# EAGLE board flight-computer v12 (EAGLE 9.7.0)
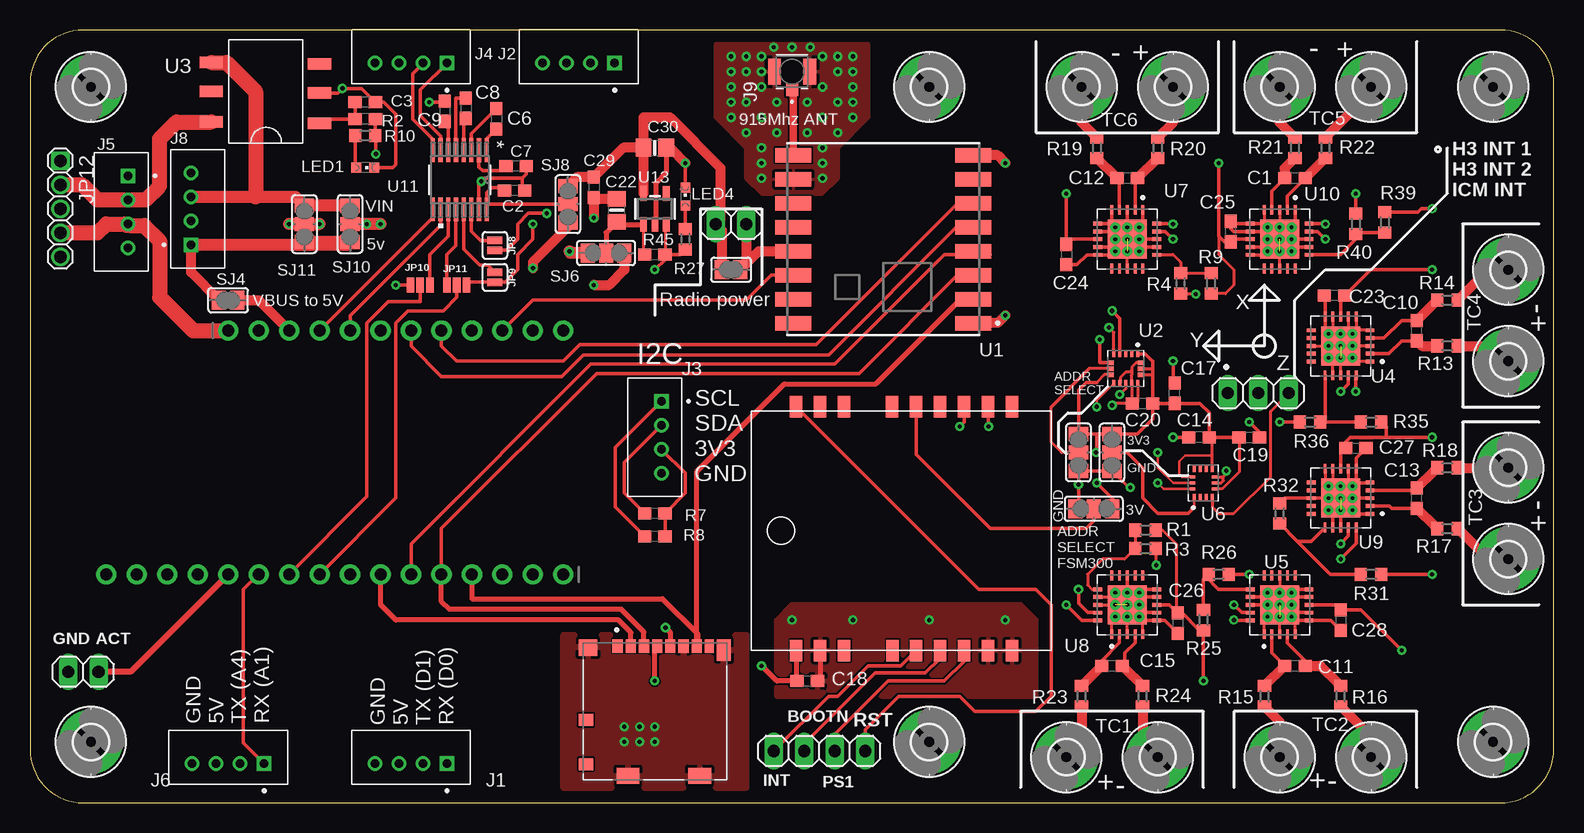
[diagram p0: board, top side]
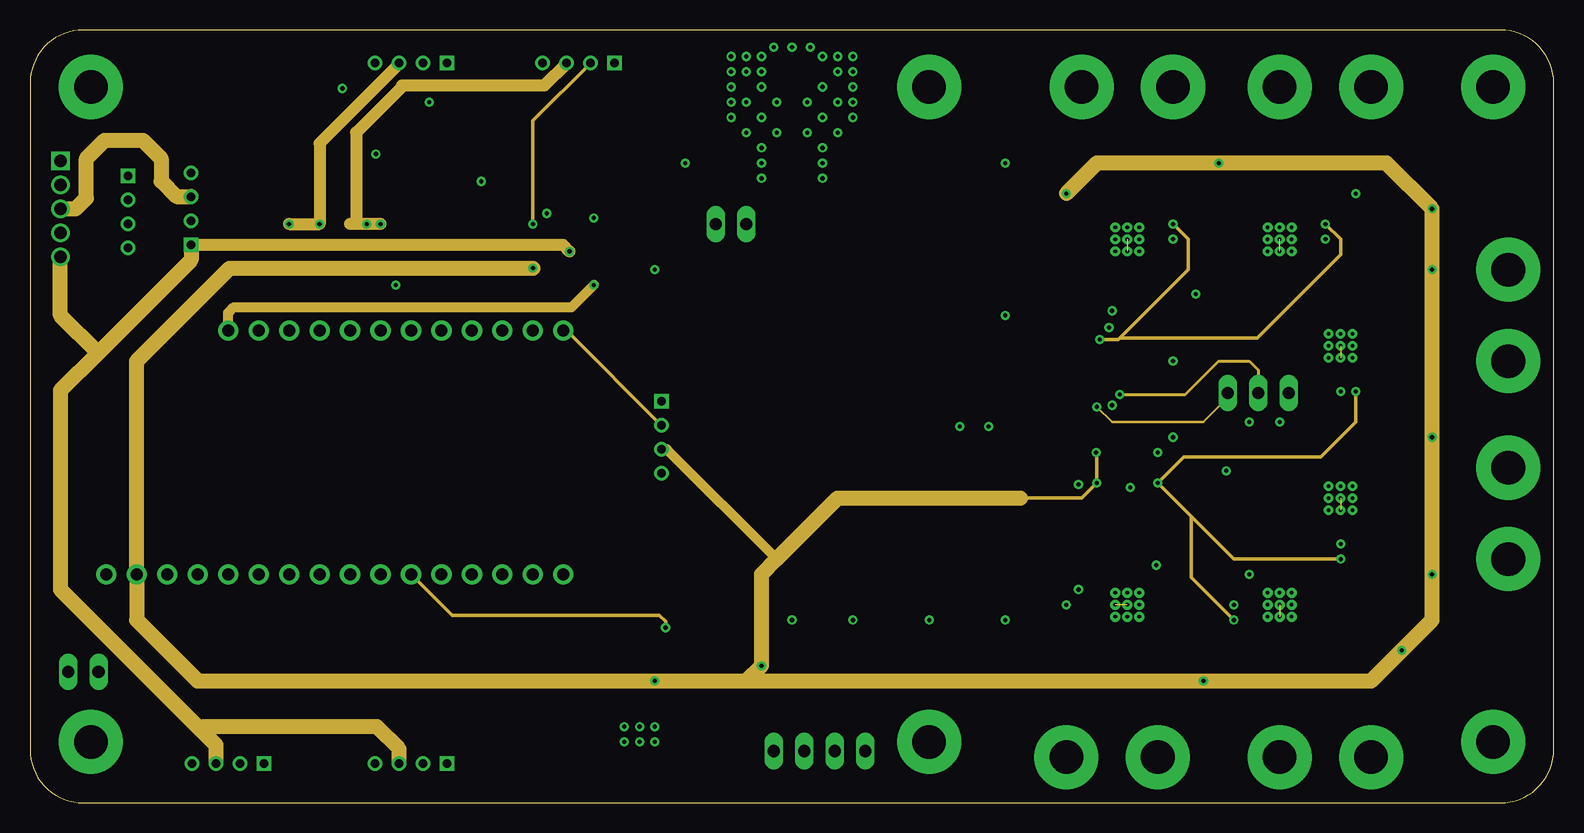
[diagram p1: board, inner layer Route2]
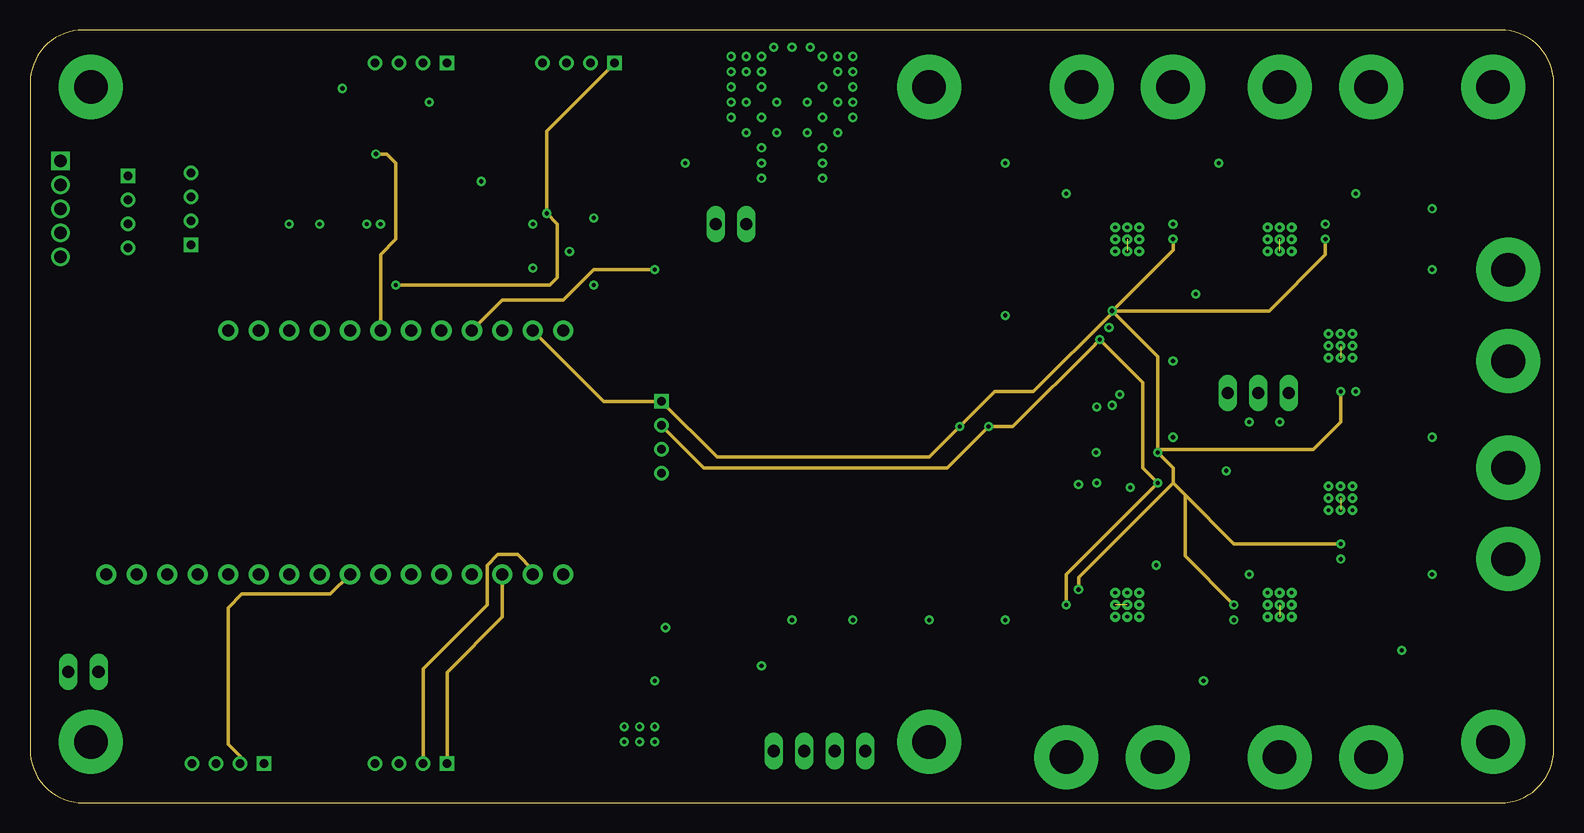
[diagram p2: board, inner layer Route15]
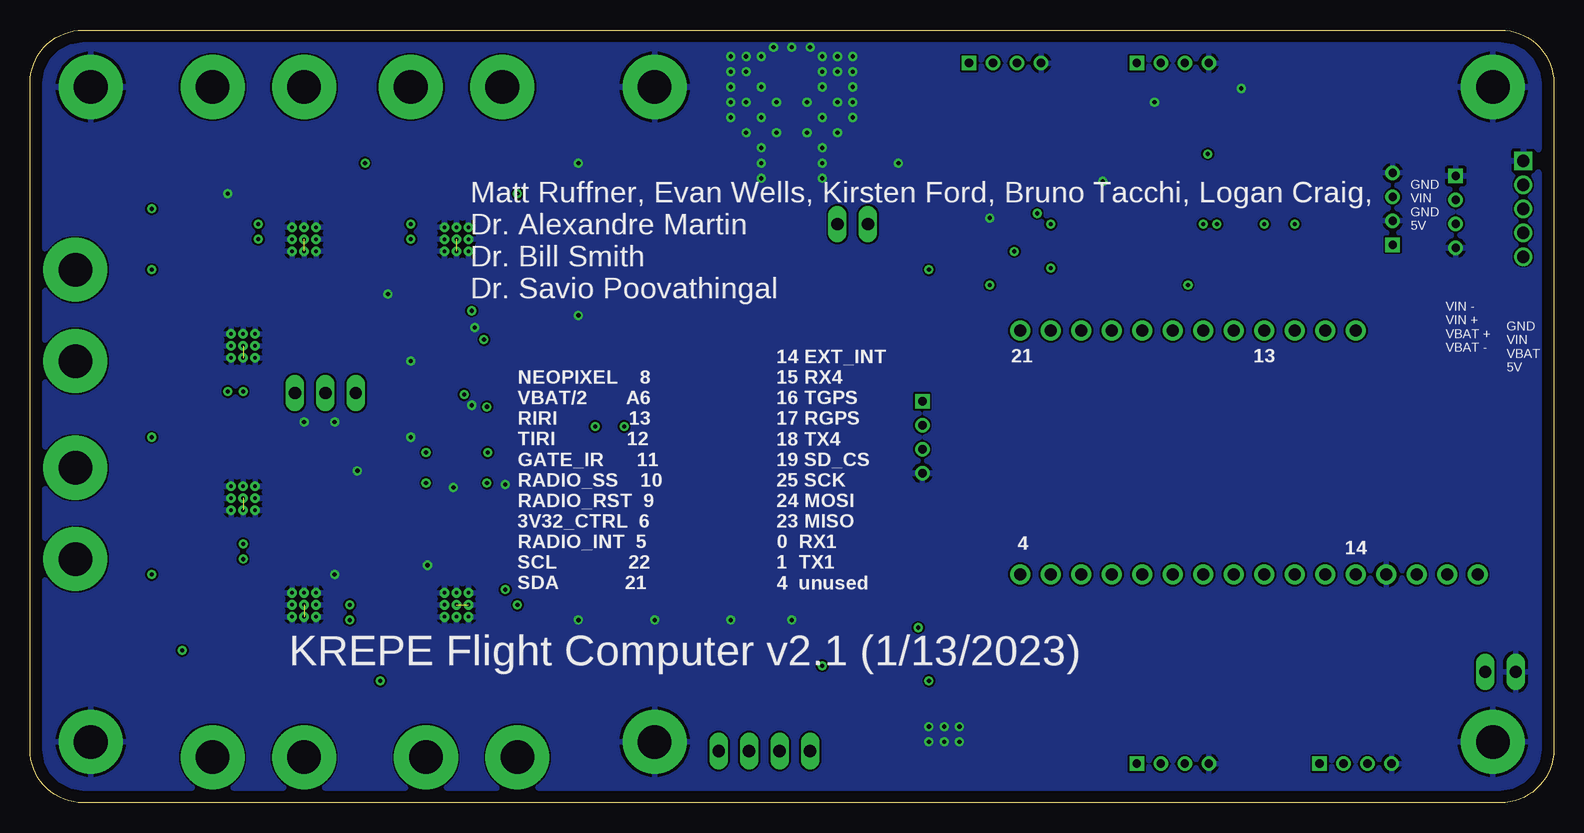
[diagram p3: board, bottom side, seen from below]

Size 126.98 x 64.44 mm. Coordinates in mm from the lower left corner, seen from the top.
Outline: 0,59.99 0,4.45 arc90 4.45,0 122.53,0 arc90 126.98,4.45 126.98,59.99 arc90 122.53,64.44 4.45,64.44 arc90 0,59.99
Copper layers (1*2+15*16): Top / Route2 / Route15 / Bottom
Stack-up Default Layer Stack: Top User Defined 0.035mm / Dielectric-2 User Defined 1.5mm / Route2 User Defined 0.035mm / Dielectric-1 User Defined 0.15mm / Route15 User Defined 0.035mm / Dielectric-3 User Defined 0.2mm / Bottom User Defined 0.035mm
Design rules: minimum drill size 0.35mm, minimum copper width class=1 12mil, minimum copper width class=2 10mil, minimum copper width 6mil, keepout clearance 0mil, drill distance 6mil, dimension clearance 40mil, restrict clearance 0mil, copper clearance wire_polygon to wire_polygon 6mil, copper clearance wire_polygon to pad_smd 6mil, copper clearance wire_polygon to via 6mil, copper clearance pad_smd to pad_smd 6mil, copper clearance pad_smd to via 6mil, copper clearance via to via 6mil, copper clearance smd to pad (same net) 6mil, copper clearance smd to via (same net) 6mil, copper clearance smd to smd (same net) 6mil
Net classes: 1 power: width 0.305 mm; 2 gnd: width 0.254 mm

## Footprints (pad centres in the part's own frame; a part is rotated, then mirrored left to right if it is on the bottom)
C0603 = smd 1.1 x 1: 1 -0.85,0; 2 0.85,0
0805-NO = smd 1.3 x 1.5: 1 -0.95,0; 2 0.95,0
0603-NO = smd 1.1 x 1: 1 -0.85,0; 2 0.85,0
2,8-PAD = drill 2.8 pad 5.334: B2,8 0,0
JST_B4B-PH-K-S(LF)(SN) = drill 0.7 square: 1 3,-0.55 | drill 0.7: 2 1,-0.55; 3 -1,-0.55; 4 -3,-0.55
MOLEX_104031-0811 = smd 0.85 x 1.1: 1 3.105,-5.45; 2 2.005,-5.45; 3 0.905,-5.45; 4 -0.195,-5.45; 5 -1.295,-5.45; 6 -2.395,-5.45; 7 -3.495,-5.45 | smd 0.75 x 1.1: 8 -4.545,-5.45 | smd 1.2 x 1: 9 5.74,0.7; 10 5.74,4.4 | smd 1.55 x 1.35: G1 5.565,-5.325 | smd 1.17 x 1.8: G2 -5.755,-5.1 | smd 1.9 x 1.35: G3 -3.73,5.375; G4 2.24,5.375
HRS_U.FL-R-SMT(10) = smd 1.05 x 1: 1 -1.525,0 | smd 2.2 x 1.05: 2 0,1.475; 3 0,-1.475
1X16_ROUND = drill 1 pad 1.676: 1 -19.05,0; 2 -16.51,0; 3 -13.97,0; 4 -11.43,0; 5 -8.89,0; 6 -6.35,0; 7 -3.81,0; 8 -1.27,0; 9 1.27,0; 10 3.81,0; 11 6.35,0; 12 8.89,0; 13 11.43,0; 14 13.97,0; 15 16.51,0; 16 19.05,0
1X12_ROUND = drill 1 pad 1.676: 1 -13.97,0; 2 -11.43,0; 3 -8.89,0; 4 -6.35,0; 5 -3.81,0; 6 -1.27,0; 7 1.27,0; 8 3.81,0; 9 6.35,0; 10 8.89,0; 11 11.43,0; 12 13.97,0
1X02 = drill 1.016 long: 1 -1.27,0; 2 1.27,0
1X04 = drill 1.016 long: 1 -3.81,0; 2 -1.27,0; 3 1.27,0; 4 3.81,0
1X03 = drill 1.016 long: 1 -2.54,0; 2 0,0; 3 2.54,0
SMT-JUMPER_2_NC_PASTE_SILK = smd 0.635 x 1.27: 1 -0.406,0; 2 0.406,0
SMT-JUMPER_3_2-NC_PASTE_NO-SILK = smd 0.635 x 1.27: 1 -0.813,0; 2 0,0; 3 0.813,0
1_05X2MM = drill 1.016 pad 1.3 square: 1 -4,0 | drill 1.016 pad 1.3: 2 -2,0; 3 0,0; 4 2,0; 5 4,0
CHIPLED_0603 = smd 0.8 x 0.8: A 0,-0.75; C 0,0.75
R0603 = smd 1 x 1.1: 1 -0.85,0; 2 0.85,0
SJ_2 = smd 1.168 x 1.6: 1 -1.524,0; 2 0,0; 3 1.524,0
SJ = smd 1.168 x 1.6: 1 -0.762,0; 2 0.762,0
MOD_COM-13909 = smd 3 x 1.2: 1 -7.5,7; 2 -7.5,5; 3 -7.5,3; 4 -7.5,1; 5 -7.5,-1; 6 -7.5,-3; 7 -7.5,-5; 8 -7.5,-7; 9 7.5,-7; 10 7.5,-5; 11 7.5,-3; 12 7.5,-1; 13 7.5,1; 14 7.5,3; 15 7.5,5; 16 7.5,7
PQFN50P300X300X100-16N = smd 0.53 x 0.35: 1 -1.22,1; 2 -1.22,0.5; 3 -1.22,0; 4 -1.22,-0.5; 5 -1.22,-1; 9 1.22,-1; 10 1.22,-0.5; 11 1.22,0; 12 1.22,0.5; 13 1.22,1 | smd 0.35 x 0.53: 6 -0.5,-1.22; 7 0,-1.22; 8 0.5,-1.22; 14 0.5,1.22; 15 0,1.22; 16 -0.5,1.22
SOP6 = smd 1.93 x 0.965: 1 -4.318,6.985; 2 -4.318,4.445; 3 -4.318,2.032; 4 4.699,1.905; 5 4.699,4.318; 6 4.699,6.858
QFN65P500X500X100-21N_MCP96L00T-E/MX = smd 0.81 x 0.32: 1 -2.45,1.3; 2 -2.45,0.65; 3 -2.45,0; 4 -2.45,-0.65; 5 -2.45,-1.3; 11 2.45,-1.3; 12 2.45,-0.65; 13 2.45,0; 14 2.45,0.65; 15 2.45,1.3 | smd 0.32 x 0.81: 6 -1.3,-2.45; 7 -0.65,-2.45; 8 0,-2.45; 9 0.65,-2.45; 10 1.3,-2.45; 16 1.3,2.45; 17 0.65,2.45; 18 0,2.45; 19 -0.65,2.45; 20 -1.3,2.45 | smd 3.25 x 3.25: 21 0,0 | drill 0.3 pad 0.5: 22 -1,1; 23 0,1; 24 1,1; 25 -1,0; 26 0,0; 27 1,0; 28 -1,-1; 29 0,-1; 30 1,-1
IC_ICM-42670-P = smd 0.475 x 0.25: 1 -1.163,0.75; 2 -1.163,0.25; 3 -1.163,-0.25; 4 -1.163,-0.75; 8 1.163,-0.75; 9 1.163,-0.25; 10 1.163,0.25; 11 1.163,0.75 | smd 0.25 x 0.475: 5 -0.5,-0.912; 6 0,-0.912; 7 0.5,-0.912; 12 0.5,0.912; 13 0,0.912; 14 -0.5,0.912
RQ_16_ADI = smd 1.981 x 0.351: 1 -2.465,2.24; 2 -2.465,1.6; 3 -2.465,0.96; 4 -2.465,0.32; 5 -2.465,-0.32; 6 -2.465,-0.96; 7 -2.465,-1.6; 8 -2.465,-2.24; 9 2.465,-2.24; 10 2.465,-1.6; 11 2.465,-0.96; 12 2.465,-0.32; 13 2.465,0.32; 14 2.465,0.96; 15 2.465,1.6; 16 2.465,2.24
SOT23-5 = smd 0.55 x 1.2: 1 -0.95,-1.3; 2 0,-1.3; 3 0.95,-1.3; 4 0.95,1.3; 5 -0.95,1.3
FSM300_FOOTPRINT = smd 1.778 x 1.016: 1 0,21.25; 2 0,19.25; 3 0,17.25; 4 0,13.208; 5 0,11.25; 6 0,9.25; 7 0,7.25; 8 0,5.25; 9 0,3.25; 10 20.32,3.25; 11 20.32,5.25; 12 20.32,7.25; 13 20.32,9.25; 14 20.32,11.25; 15 20.32,13.25; 16 20.32,17.25; 17 20.32,19.25; 18 20.32,21.25

## Placement (x,y rotation side)
C1  0.1uF  [C0603]  105.41,52.07 180 top
C2  0.1uF  [C0603]  40.39,51.05 180 top
C3  0.1uF  [C0603]  27.94,58.42 180 top
C6  0.1uF  [C0603]  38.86,57.02 270 top
C7  0.1uF  [C0603]  40.51,53.09 180 top
C8  0.1uF  [C0603]  36.32,57.91 270 top
C9  0.1uF  [C0603]  34.54,57.66 270 top
C10  0.1uF  [C0603]  115.57,39.37 90 top
C11  0.1uF  [C0603]  105.41,11.43 0 top
C12  0.1uF  [C0603]  91.44,52.07 180 top
C13  0.1uF  [C0603]  115.57,25.4 90 top
C14  0.1uF  [C0603]  97.41,30.48 180 top
C15  0.1uF  [C0603]  90.17,11.43 0 top
C17  0.1uF  [C0603]  95.38,34.16 90 top
C18  0.1uF  [C0603]  64.77,10.16 0 top
C19  0.1uF  [C0603]  101.6,30.48 0 top
C20  0.1uF  [C0603]  92.71,33.27 180 top
C22  10µF  [0805-NO]  48.9,49.4 90 top
C23  0.1uF  [C0603]  108.71,42.29 180 top
C24  0.1uF  [C0603]  86.36,45.72 270 top
C25  0.1uF  [C0603]  100.08,47.62 90 top
C26  0.1uF  [C0603]  95.63,14.99 270 top
C27  0.1uF  [C0603]  110.49,29.59 0 top
C28  0.1uF  [C0603]  109.22,15.24 270 top
C29  1uF  [0603-NO]  46.99,51.31 270 top
C30  10µF  [0805-NO]  52.07,54.61 0 top
H1  MOUNT-PAD-ROUND2.8  [2,8-PAD]  74.93,5.08 0 top
H2  MOUNT-PAD-ROUND2.8  [2,8-PAD]  74.93,59.69 0 top
H3  MOUNT-PAD-ROUND2.8  [2,8-PAD]  121.92,59.69 0 top
H4  MOUNT-PAD-ROUND2.8  [2,8-PAD]  121.92,5.08 0 top
H5  MOUNT-PAD-ROUND2.8  [2,8-PAD]  5.08,59.69 0 top
H6  MOUNT-PAD-ROUND2.8  [2,8-PAD]  5.08,5.08 0 top
H7  MOUNT-PAD-ROUND2.8  [2,8-PAD]  123.19,20.32 0 top
H8  MOUNT-PAD-ROUND2.8  [2,8-PAD]  123.19,27.94 0 top
H9  MOUNT-PAD-ROUND2.8  [2,8-PAD]  123.19,36.83 0 top
H10  MOUNT-PAD-ROUND2.8  [2,8-PAD]  123.19,44.45 0 top
H11  MOUNT-PAD-ROUND2.8  [2,8-PAD]  95.25,59.69 0 top
H12  MOUNT-PAD-ROUND2.8  [2,8-PAD]  87.63,59.69 0 top
H13  MOUNT-PAD-ROUND2.8  [2,8-PAD]  111.76,59.69 0 top
H14  MOUNT-PAD-ROUND2.8  [2,8-PAD]  104.14,59.69 0 top
H15  MOUNT-PAD-ROUND2.8  [2,8-PAD]  86.36,3.81 0 top
H16  MOUNT-PAD-ROUND2.8  [2,8-PAD]  93.98,3.81 0 top
H17  MOUNT-PAD-ROUND2.8  [2,8-PAD]  104.14,3.81 0 top
H18  MOUNT-PAD-ROUND2.8  [2,8-PAD]  111.76,3.81 0 top
J1  B4B-PH-K-S(LF)(SN)  [JST_B4B-PH-K-S(LF)(SN)]  31.75,3.81 0 top
J2  B4B-PH-K-S(LF)(SN)  [JST_B4B-PH-K-S(LF)(SN)]  45.72,62.23 0 top
J3  B4B-PH-K-S(LF)(SN)  [JST_B4B-PH-K-S(LF)(SN)]  52.07,30.48 90 top
J4  B4B-PH-K-S(LF)(SN)  [JST_B4B-PH-K-S(LF)(SN)]  31.75,62.23 0 top
J5  B4B-PH-K-S(LF)(SN)  [JST_B4B-PH-K-S(LF)(SN)]  7.62,49.28 90 top
J6  B4B-PH-K-S(LF)(SN)  [JST_B4B-PH-K-S(LF)(SN)]  16.51,3.81 0 top
J7  104031-0811  [MOLEX_104031-0811]  52.07,7.62 180 top
J8  B4B-PH-K-S(LF)(SN)  [JST_B4B-PH-K-S(LF)(SN)]  13.97,49.53 270 top
J9  U.FL-R-SMT(10)  [HRS_U.FL-R-SMT(10)]  63.5,60.96 90 top
JP1  [1X16_ROUND]  25.4,19.05 180 top
JP3  [1X12_ROUND]  30.48,39.37 0 top
JP4  [1X02]  58.42,48.26 180 top
JP5  [1X02]  4.45,10.92 180 top
JP6  [1X04]  65.79,4.32 180 top
JP7  [1X03]  102.36,34.16 180 top
JP8  JUMPER-SMT_2_NC_PASTE_SILK  [SMT-JUMPER_2_NC_PASTE_SILK]  38.73,46.48 270 top
JP9  JUMPER-SMT_2_NC_PASTE_SILK  [SMT-JUMPER_2_NC_PASTE_SILK]  38.73,43.81 270 top
JP10  JUMPER-SMT_3_2-NC_PASTE_NO-SILK  [SMT-JUMPER_3_2-NC_PASTE_NO-SILK]  32.51,43.18 0 top
JP11  JUMPER-SMT_3_2-NC_PASTE_NO-SILK  [SMT-JUMPER_3_2-NC_PASTE_NO-SILK]  35.56,43.18 180 top
JP12  PINHD-1X55X2MM  [1_05X2MM]  2.54,49.53 270 top
LED1  [CHIPLED_0603]  27.94,52.96 270 top
LED4  [CHIPLED_0603]  54.61,50.55 0 top
R1  10k  [R0603]  92.96,22.73 180 top
R2  288  [0603-NO]  27.94,57.02 180 top
R3  7.5k  [R0603]  92.96,21.21 180 top
R4  4.3k  [R0603]  95.89,43.31 90 top
R7  100k  [0603-NO]  52.07,24.13 180 top
R8  100k  [0603-NO]  52.07,22.23 180 top
R9  10k  [R0603]  98.42,43.31 90 top
R10  [R0603]  27.94,55.63 180 top
R13  100  [R0603]  118.11,38.1 180 top
R14  100  [R0603]  118.11,41.91 180 top
R15  100  [R0603]  102.87,8.89 90 top
R16  100  [R0603]  109.22,8.89 90 top
R17  100  [R0603]  118.11,22.86 180 top
R18  100  [R0603]  118.11,27.94 180 top
R19  100  [R0603]  88.9,54.61 270 top
R20  100  [R0603]  93.98,54.61 270 top
R21  100  [R0603]  105.41,54.61 270 top
R22  100  [R0603]  107.95,54.61 270 top
R23  100  [R0603]  87.63,8.89 90 top
R24  100  [R0603]  92.71,8.89 90 top
R25  10k  [R0603]  97.79,15.24 90 top
R26  13k  [R0603]  99.06,19.05 180 top
R27  [R0603]  54.61,46.99 90 top
R31  10k  [R0603]  111.76,19.05 180 top
R32  7.5k  [R0603]  104.14,24.13 270 top
R35  10k  [R0603]  111.76,31.75 180 top
R36  4.3k  [R0603]  106.68,31.75 0 top
R39  10k  [R0603]  112.9,48.39 270 top
R40  2.2k  [R0603]  110.49,48.26 270 top
R45  100k  [0603-NO]  52.07,45.72 0 top
SJ3  [SJ_2]  88.65,24.51 180 top
SJ4  [SJ]  16.51,41.91 0 top
SJ5  [SJ_2]  90.17,29.21 90 top
SJ6  [SJ_2]  48.01,45.85 0 top
SJ7  [SJ_2]  87.38,29.21 90 top
SJ8  [SJ_2]  44.83,49.91 90 top
SJ9  [SJ]  58.42,44.45 180 top
SJ10  [SJ_2]  26.67,48.26 270 top
SJ11  [SJ_2]  22.86,48.26 270 top
U1  COM-13909  [MOD_COM-13909]  71.12,46.99 180 top
U2  H3LIS100DLTR  [PQFN50P300X300X100-16N]  91.31,36.2 270 top
U3  AQV252G  [SOP6]  19.81,63.63 180 top
U4  MCP96L00T-E/MX  [QFN65P500X500X100-21N_MCP96L00T-E/MX]  109.22,38.1 180 top
U5  MCP96L00T-E/MX  [QFN65P500X500X100-21N_MCP96L00T-E/MX]  104.14,16.51 90 top
U6  ICM-42670-P  [IC_ICM-42670-P]  97.79,26.67 90 top
U7  MCP96L00T-E/MX  [QFN65P500X500X100-21N_MCP96L00T-E/MX]  91.44,46.99 270 top
U8  MCP96L00T-E/MX  [QFN65P500X500X100-21N_MCP96L00T-E/MX]  91.44,16.51 90 top
U9  MCP96L00T-E/MX  [QFN65P500X500X100-21N_MCP96L00T-E/MX]  109.22,25.4 180 top
U10  MCP96L00T-E/MX  [QFN65P500X500X100-21N_MCP96L00T-E/MX]  104.14,46.99 270 top
U11  UM3232EEAE  [RQ_16_ADI]  35.81,51.94 270 top
U13  SPX3819-3.3  [SOT23-5]  52.07,49.53 0 top
U$4  FSM300  [FSM300_FOOTPRINT]  85.09,12.7 90 top

## Library data of the parts
C1-C3 C6-C15 C17-C20 C23-C28 = rcl; SPICEPREFIX: C
C22 C29 C30 JP1 JP3 R2 R7 R8 R45 U13 = microbuilder
H1-H18 = holes
J1-J6 J8 = B4B-PH-K-S_LF__SN_; DESCRIPTION: Connector Header Through Hole 4 position 0.079 (2.00mm); DIGI-KEY_PART_NUMBER: 455-1706-ND; MF: JST; MP: B4B-PH-K-S(LF)(SN); PACKAGE: None; PURCHASE-URL: https://pricing.snapeda.com/search/part/B4B-PH-K-S(LF)(SN)/?ref=eda
J7 = 104031-0811; DESCRIPTION: 10 (8 + 2) Position Card Connector Secure Digital - microSD™ Surface Mount, Right Angle Gold; DIGI-KEY_PART_NUMBER: WM6357TR-ND; MF: Molex; MP: 104031-0811; PACKAGE: None; PURCHASE-URL: https://pricing.snapeda.com/search/part/104031-0811/?ref=eda
J9 = U.FL-R-SMT_10_; DESCRIPTION: U.FL (UMCC) Connector Receptacle, Male Pin 50Ohm Surface Mount Solder; DIGI-KEY_PART_NUMBER: H9161TR-ND; MF: Hirose Electric Co Ltd; MP: U.FL-R-SMT(10); PACKAGE: None; PURCHASE-URL: https://pricing.snapeda.com/search/part/U.FL-R-SMT(10)/?ref=eda
JP4-JP7 = pinhead
JP8-JP11 = SparkFun-Jumpers
JP12 = Connector; CATEGORY: CONNECTOR; SUB-CATEGORY: PIN-HEADER
LED1 LED4 = adafruit
R1 R3 R4 R9 R10 R13-R27 R31 R32 R35 R36 R39 R40 = rcl; SPICEPREFIX: R
SJ3-SJ11 = jumper
U1 = COM-13909; DESCRIPTION: General ISM < 1GHz Transceiver Module 915MHz Surface Mount; DIGI-KEY_PART_NUMBER: 1568-1394-ND; DIGI-KEY_PURCHASE_URL: https://www.digikey.com/product-detail/en/sparkfun-electronics/COM-13909/1568-1394-ND/6023504?utm_source=snapeda&utm_medium=aggregator&utm_campaign=symbol; MF: SparkFun Electronics; MP: COM-13909; PACKAGE: Module SparkFun Electronics
U2 = H3LIS100DLTR; DESCRIPTION: Accelerometer X, Y, Z Axis ±100g 25Hz ~ 200Hz 16-TFLGA (3x3); DIGI-KEY_PART_NUMBER: 497-15697-2-ND; MF: STMicroelectronics; MP: H3LIS100DLTR; PACKAGE: TFLGA-16 STMicroelectronics; PURCHASE-URL: https://pricing.snapeda.com/search/part/H3LIS100DLTR/?ref=eda
U3 = AQV252G; DESCRIPTION: Solid State SPST-NO (1 Form A) 6-SMD (0.300, 7.62mm); DIGI-KEY_PART_NUMBER: 255-1791-5-ND; MF: Panasonic; MP: AQV252G; PACKAGE: None; PURCHASE-URL: https://pricing.snapeda.com/search/part/AQV252G/?ref=eda
U4 U5 U7-U10 = MCP96L00T-E_MX; DESCRIPTION: +/- 4.0C THERMOCOUPLE TO I2C CON; DIGI-KEY_PART_NUMBER: MCP96L00T-E/MXCT-ND; MF: Microchip Technology; MP: MCP96L00T-E/MX; PACKAGE: VQFN-20 Microchip; PURCHASE-URL: https://pricing.snapeda.com/search/part/MCP96L00T-E/MX/?ref=eda
U6 = ICM-42670-P; DESCRIPTION: Low-Power, Premium Performance 6-Axis MotionTrackingTM IMU with I3C, I2C and SPI interface in 2.5mm x 3mm Package; DIGI-KEY_PART_NUMBER: 1428-ICM-42670-PTR-ND; MF: TDK InvenSense; MP: ICM-42670-P; PACKAGE: None; PURCHASE-URL: https://pricing.snapeda.com/search/part/ICM-42670-P/?ref=eda
U11 = ADM310
U$4 = COM-13909

## Nets
3V3: C14.1 C17.1 C18.1 C19.1 C20.1 C23.1 C24.1 C25.1 C26.1 C27.1 C28.1 J3.3 J7.4 JP1.15 R1.1 R7.1 R8.1 R9.1 R25.1 R31.1 R35.1 R39.1 SJ3.1 SJ5.3 SJ7.3 SJ8.1 U2.1 U2.8 U2.14 U2.15 U4.8 U5.8 U6.5 U6.8 U6.12 U7.8 U8.8 U9.8 U10.8 U$4.1
3V32: C29.1 C30.1 JP4.2 SJ8.3 SJ9.2 U13.5
3V32_CTRL: JP3.9 R27.1 R45.2 U13.3
5V: J1.3 J6.3 J8.1 JP12.5 SJ4.1 SJ6.1 SJ10.3 SJ11.3
!RESET: JP1.16
AREF: JP1.14
BOOTN: JP6.3 U$4.6
EXT_INT: JP1.12 JP5.1
FSM300_RESET: JP6.1 U$4.18
GATE_IRIDIUM: JP3.6 R2.1 R10.1
GND [gnd]: C2.1 C3.1 C7.1 C9.1 C14.2 C17.2 C18.2 C19.2 C20.2 C22.2 C23.2 C24.2 C25.2 C26.2 C27.2 C28.2 C29.2 C30.2 H1.B2,8 H2.B2,8 H3.B2,8 H4.B2,8 H5.B2,8 H6.B2,8 J1.4 J2.4 J3.4 J4.4 J5.1 J5.4 J6.4 J7.6 J7.G1 J7.G2 J7.G3 J7.G4 J8.2 J8.4 J9.2 J9.3 JP1.13 JP5.2 JP12.1 LED1.C LED4.C R3.1 R4.1 R26.1 R32.1 R36.1 R40.1 SJ3.3 SJ5.1 SJ7.1 U1.1 U1.8 U1.10 U2.5 U2.10 U2.12 U2.13 U2.16 U3.2 U4.1 U4.3 U4.5 U4.6 U4.7 U4.9 U4.10 U4.13 U4.17 U4.18 U4.21 U4.22 U4.23 U4.24 U4.25 U4.26 U4.27 U4.28 U4.29 U4.30 U5.1 U5.3 U5.5 U5.6 U5.7 U5.9 U5.10 U5.13 U5.17 U5.18 U5.21 U5.22 U5.23 U5.24 U5.25 U5.26 U5.27 U5.28 U5.29 U5.30 U6.6 U6.7 U7.1 U7.3 U7.5 U7.6 U7.7 U7.9 U7.10 U7.13 U7.17 U7.18 U7.21 U7.22 U7.23 U7.24 U7.25 U7.26 U7.27 U7.28 U7.29 U7.30 U8.1 U8.3 U8.5 U8.6 U8.7 U8.9 U8.10 U8.13 U8.17 U8.18 U8.21 U8.22 U8.23 U8.24 U8.25 U8.26 U8.27 U8.28 U8.29 U8.30 U9.1 U9.3 U9.5 U9.6 U9.7 U9.9 U9.10 U9.13 U9.17 U9.18 U9.21 U9.22 U9.23 U9.24 U9.25 U9.26 U9.27 U9.28 U9.29 U9.30 U10.1 U10.3 U10.5 U10.6 U10.7 U10.9 U10.10 U10.13 U10.17 U10.18 U10.21 U10.22 U10.23 U10.24 U10.25 U10.26 U10.27 U10.28 U10.29 U10.30 U11.15 U13.2 U$4.2 U$4.8 U$4.9
H3_INT1: JP7.2 U2.11
H3_INT2: JP7.3 U2.9
HINTN: JP6.4 U$4.5
ICM_INT: JP7.1 U6.4
MISO: J7.7 JP1.4 U1.2
MOSI: J7.3 JP1.5 U1.3
N$1: JP4.1 SJ9.1 U1.13
N$2: H7.B2,8 R17.1
N$5: C6.2 U11.1
N$6: J2.3 SJ10.2
N$7: SJ5.2 U6.1
N$8: H8.B2,8 R18.1
N$9: C2.2 SJ8.2 U11.16
N$10: R1.2 R3.2 U8.16
N$11: C7.2 U11.2
N$12: C6.1 U11.3
N$13: C8.2 U11.4
N$14: C8.1 U11.5
N$15: C9.2 U11.6
N$16: J4.3 SJ11.2
N$17: R4.2 R9.2 U7.16
N$18: C3.2 R2.2 U3.1
N$19: LED1.A R10.2
N$20: H9.B2,8 R13.1
N$21: H10.B2,8 R14.1
N$22: H11.B2,8 R20.1
N$23: H12.B2,8 R19.1
N$24: H13.B2,8 R22.1
N$25: H14.B2,8 R21.1
N$26: H15.B2,8 R23.1
N$27: H16.B2,8 R24.1
N$28: H17.B2,8 R15.1
N$29: H18.B2,8 R16.1
N$30: C22.1 R45.1 SJ6.2 U13.1
N$31: J9.1 U1.9
N$32: C10.1 R13.2 U4.2
N$34: C10.2 R14.2 U4.4
N$35: SJ7.2 U2.7
N$37: LED4.A R27.2
N$38: JP1.10 JP10.2
N$39: JP1.9 JP11.2
N$44: SJ3.2 U$4.14
N$45: C12.1 R20.2 U7.2
N$46: C12.2 R19.2 U7.4
N$47: C15.1 R23.2 U8.2
N$48: C1.2 R21.2 U10.4
N$49: C15.2 R24.2 U8.4
N$50: C1.1 R22.2 U10.2
N$51: C13.1 R17.2 U9.2
N$53: C13.2 R18.2 U9.4
N$54: C11.1 R15.2 U5.2
N$55: C11.2 R16.2 U5.4
N$57: R25.2 R26.2 U5.16
N$58: R31.2 R32.2 U9.16
N$60: R35.2 R36.2 U4.16
N$62: R39.2 R40.2 U10.16
PS1: JP6.2 U$4.7
R232: J4.2 U11.8
R232_GPS: JP9.1 U11.13
RADIO_INT: JP3.10 U1.14
RADIO_RESET: JP3.8 U1.6
RADIO_SS: JP3.7 U1.5
RGPS: JP11.3 U11.12
RIRI: JP3.4 U11.9
RX1: J1.1 JP1.3
RX4: J6.1 JP1.11
RX_GPS: J2.2 JP9.2 JP11.1
SCK: J7.5 JP1.6 U1.4
SCL: J3.1 JP3.11 R8.2 U2.4 U4.19 U5.19 U6.13 U7.19 U8.19 U9.19 U10.19 U$4.12
SD_CS: J7.2 JP1.7
SDA: J3.2 JP3.12 R7.2 U2.6 U4.20 U5.20 U6.14 U7.20 U8.20 U9.20 U10.20 U$4.11
T232: J4.1 U11.7
T232_GPS: JP8.1 U11.14
TGPS: JP10.3 U11.11
TIRI: JP3.5 U11.10
TX1: J1.2 JP1.2
TX4: J6.2 JP1.8
TX_GPS: J2.1 JP8.2 JP10.1
VBAT: J5.3 JP3.1 JP12.4 SJ6.3
VBUS: JP3.3 SJ4.2
VIN: J8.3 JP12.3 SJ10.1 SJ11.1 U3.4
VIN_PRE: J5.2 JP12.2 U3.6

## Tracks (layer width: path | path; a pad name or v marks a point on that pad's centre or on a via)
3V3  (via drill 0.35)
  Top 0.203: U6.12 96.02,27.17 95.76,27.43 95.76,28.45 96.27,28.96 98.51,28.96
  Top 0.254: U2.8 89.53,35.7 88.9,35.06 | U2.14 93.56,35.7 | U6.8 98.51,27.86 98.51,28.96 98.51,30.23 C14.1 | U6.5 99.34,26.17 100.75,27.58 C19.1 | 99.06,47.24 99.06,45.72 100.33,44.45 100.33,43.18 99.61,42.46 R9.1 | R1.1 94.36,22.73 95.5,21.59 95.5,15.96 C26.1 | U2.15 93.56,36.2
  Top 0.305: C20.1 93.56,32 92.29,30.73 SJ5.3 88.9,30.73 | U9.8 109.22,29.17 C27.1 109.64,30.1 110.02,30.48 113.03,30.48 | 113.03,30.48 v116.84,30.48 | R35.1 113.03,31.33 113.03,30.48 | R31.1 v116.84,19.05 | U8.8 94.96,16.51 C26.1 96.01,15.84 97.46,14.39 R25.1 v97.79,10.16 | U5.8 108.8,16.51 C28.1 110.91,16.09 v114.3,12.7 | U2.1 92.95,37.41 93.53,36.83 93.56,36.83 93.56,36.2 93.56,35.7 C20.1 | U4.8 109.22,42.29 C23.1 111.72,44.45 v116.84,44.45 | R39.1 115.66,49.24 115.95,49.53 v116.84,49.53 | U10.8 100.29,46.99 C25.1 99.53,46.77 99.06,47.24 v99.06,53.34 | U7.8 86.78,46.99 C24.1 v86.36,50.8 | C20.1 95.34,33.27 C17.1 97.5,33.31 98.26,32.55 C14.1 C19.1 | v88.9,26.67 90.3,25.27 90.04,25.02 90.17,24.89 SJ3.1 | 88.9,30.73 SJ7.3 87.38,34.42 88.02,35.06 88.9,35.06 | v88.84,29.21 88.9,29.27 88.9,30.73 | J3.3 54.61,27.49 54.61,25.82 R7.1 R8.1
  Top 0.406: v52.07,10.16 52.07,12.88 J7.4 | v60.96,11.43 62.23,10.16 C18.1 63.84,10.24 U$4.1
  Top 0.813: SJ8.1 44.83,48.01 41.91,45.09 v41.91,44.58
  Route2 0.305: 82.55,25.4 87.63,25.4 v88.9,26.67 88.9,29.21 v88.84,29.21
  Route2 0.813: 62.23,20.32 53.07,29.48 J3.3
  Route2 1.27: 59.69,10.16 v52.07,10.16 13.97,10.16 8.89,15.24 JP1.15 8.89,36.83 16.64,44.58 v41.91,44.58 | 59.69,10.16 v60.96,11.43 60.96,19.05 62.23,20.32 67.31,25.4 82.55,25.4 | v86.36,50.8 88.9,53.34 v99.06,53.34 113.03,53.34 v116.84,49.53 v116.84,44.45 v116.84,30.48 v116.84,19.05 116.84,15.24 v114.3,12.7 111.76,10.16 v97.79,10.16 59.69,10.16
3V32
  Top 0.813: C30.1 49.44,54.61 C29.1 45.55,52.16 SJ8.3 | C30.1 U13.5 | C30.1 51.12,57.15 53.34,57.15 57.53,52.96 57.53,48.64 JP4.2 57.66,47.75 SJ9.2
3V32_CTRL  (via drill 0.35)
  Top 0.254: U13.3 52.92,48.13 R45.2
  Top 0.305: v52.07,44.45 52.92,45.3 R45.2 54.19,45.72 R27.1
  Route15 0.305: JP3.9 39.37,41.91 44.45,41.91 46.99,44.45 v52.07,44.45
5V  (via drill 0.35)
  Top 0.813: SJ4.1 13.42,44.24 J8.1
  Top 1.016: J8.1 26.46,46.53 SJ10.3 SJ11.3 | SJ6.1 45.09,45.85 v44.96,45.97
  Route2 0.813: 14.51,6.35 14.24,6.08
  Route2 1.016: J8.1 44.4,46.53 v44.96,45.97
  Route2 1.27: J8.1 13.42,45.26 5.67,37.51 | 5.67,37.51 2.54,34.38 2.54,17.78 14.24,6.08 15.51,4.81 J6.3 | 5.67,37.51 2.54,40.64 JP12.5 | 14.51,6.35 28.9,6.35 30.75,4.5 J1.3
BOOTN
  Top 0.305: JP6.3 64.52,4.94 70.42,10.85 74.62,10.85 75.84,12.06 U$4.6
EXT_INT
  Top 0.508: JP1.12 8.38,10.92 JP5.1
FSM300_RESET
  Top 0.305: U$4.18 79.08,17.78 83.82,17.78 85.09,16.51 85.09,8.89 83.82,7.62 78.74,7.62 77.47,8.89 72.39,8.89 69.6,6.1 JP6.1
GATE_IRIDIUM  (via drill 0.35)
  Top 0.305: R10.1 28.79,55.88 | 28.79,55.88 R2.1 | v28.83,54.1 28.83,55.84 28.79,55.88
  Route15 0.305: JP3.6 29.21,45.72 30.48,46.99 30.48,53.34 29.72,54.1 v28.83,54.1
GND  (via drill 0.35)  (6 unrouted)
  Top 0.254: C20.2 91.81,33.32 U2.12 91.77,35.02 91.77,35.63 91.82,35.69 91.82,36.07 | U2.13 92.31,33.47 92.11,33.27 C20.2 | U2.5 90.31,39.23 v89.92,39.62 | C20.2 90.3,33.27 v90.17,33.15 | v91.69,26.29 91.57,26.29 SJ5.1 | U6.6 99.26,26.67 99.44,26.85 99.44,27.18 | v99.69,27.69 99.69,27.43 99.44,27.18 | U8.1 90.14,15.21 U8.22 | U8.5 92.74,15.21 | U8.3 U8.25 | U8.18 U8.23 90.44,16.89 90.17,17.16 U8.17 | U2.16 92.19,36.7 91.82,36.32 91.82,36.07 | R4.1 97.12,42.46 v97.16,42.42 | R3.1 93.81,19.85 v93.85,19.81 | U6.7 99.43,27.17 99.44,27.18 | U5.13 U5.27 | U5.1 102.84,15.21 U5.22 | U5.3 U5.25 | U5.5 105.44,15.21 | U4.3 U4.25 | U4.1 110.52,36.8 U4.22 | U4.5 110.52,39.4 | U4.13 U4.27 | U4.7 109.87,39.45 U4.28 110.52,39.4 | U4.6 110.52,39.4 | U4.9 108.57,39.45 U4.30 | U10.13 U10.27 | U7.13 U7.27 | U10.3 U10.25 | U10.5 102.84,48.29 | U2.10 90.86,35.02 90.86,35.46 91.34,35.94 91.69,35.94 91.82,36.07 | U9.7 109.87,26.67 | U9.9 108.57,26.75 U9.30 107.92,26.7 U9.10 | U4.18 U4.23 | U4.17 108.57,36.75 U4.24
  Top 0.305: C27.2 110.52,28.77 U9.6 110.52,26.7 110.49,26.67 | R32.1 104.56,25.4 U9.13 U9.21 | R36.1 v104.14,31.75 | R26.1 v101.6,19.05 | U5.17 102.79,17.16 U5.24 | U5.18 U5.23 | C26.2 94.56,15.21 U8.6 92.74,15.21 U8.28 | U8.7 92.96,15.86 92.44,16.38 U8.29 | U8.9 92.79,17.16 U8.30 92.74,17.81 U8.10 | U8.13 U8.27 | C28.2 108.4,15.21 U5.6 105.44,15.21 U5.28 | U5.7 105.54,15.86 105.14,16.26 U5.29 | U9.5 111.64,26.67 110.49,26.67 | 110.49,26.67 109.87,26.67 | U9.3 U9.25 | U9.1 110.52,24.1 U9.22 | 110.49,26.67 U9.28 | U9.18 U9.23 | U9.17 108.57,24.05 U9.24 | U5.9 105.49,17.16 U5.30 105.44,17.81 U5.10 | C23.2 107.92,42.23 U4.10 107.95,40.52 107.95,39.37 U4.30 | U10.1 105.44,47.02 105.41,46.99 105.14,47.26 U10.22 | U10.9 103.14,46.34 U10.29 | U10.10 102.84,45.69 U10.30 | U10.18 U10.23 | U10.17 104.49,46.34 U10.27 | R40.1 v110.49,50.8 | U7.9 90.44,46.34 U7.29 | U7.30 90.04,45.59 89.95,45.69 U7.10 88.07,45.69 87.25,44.87 C24.2 | U7.7 90.09,47.64 U7.28 90.14,48.29 | U7.6 90.14,48.29 | U7.5 90.14,48.29 | U7.3 U7.25 | U7.1 92.74,48.29 U7.22 | U7.18 U7.23 | U7.17 92.79,46.34 U7.24 92.74,45.69 | C17.2 95.25,35.14 v95.25,36.83 | C14.2 v95.25,30.48 | SJ5.1 SJ7.1 v87.38,26.54 87.38,24.77 SJ3.3 | C19.2 102.45,30.9 v101.6,31.75 | LED4.C v54.61,53.34 | U3.2 25.65,59.18 v26.04,59.56 27.65,59.56 C3.1 29.46,58.42 30.48,57.4 30.48,53.21 30.23,52.96 LED1.C | C9.1 34.46,58.42 v33.27,58.42 | U11.15 37.41,51.64 v37.59,51.82 37.85,52.07 41.02,52.07 | 41.02,52.07 41.36,52.41 C7.1 | 41.02,52.07 41.02,51.27 C2.1 | U10.6 102.84,48.29 U10.28 102.79,47.64 U10.7 100.31,47.64 100.08,47.88 C25.2 100.26,48.29 U10.6
  Top 0.406: U13.2 52.13,48.28 52.13,51.68 53.02,52.58 C30.2 | U$4.2 65.84,10.38
  Top 0.813: v81.28,53.34 80.63,53.99 U1.8 | v54.61,53.34 53.34,54.61 C30.2 | v46.99,48.77 C29.2 46.99,50.35 C22.2 | U1.1 78.64,40.01 80.64,40.01 v81.28,40.64
  other vias: 63.5,15.24 74.93,15.24 68.58,15.24 81.28,15.24 49.53,6.35 50.8,6.35 52.07,6.35 52.07,5.08 50.8,5.08 49.53,5.08 58.42,60.96 58.42,59.69 58.42,58.42 58.42,57.15 59.69,55.88 60.96,54.61 60.96,53.34 60.96,52.07 66.04,52.07 66.04,53.34 66.04,54.61 67.31,55.88 68.58,57.15 68.58,58.42 68.58,59.69 68.58,60.96 68.58,62.23 67.31,62.23 66.04,62.23 65.02,62.99 63.5,62.99 61.98,62.99 60.96,62.23 58.42,62.23 59.69,62.23 60.96,57.15 59.69,58.42 59.69,60.96 60.96,60.96 60.96,59.69 62.23,58.42 62.23,55.88 64.77,55.88 64.77,58.42 66.04,57.15 67.31,58.42 66.04,59.69 67.31,60.96
  pour Bottom: 133.6,71.23 132.19,72.64 -4.06,72.64 -4.06,1.16 -2.65,-0.25 133.6,-0.25
  pour Top: 84.02,15.32 82.63,16.71 63.42,16.71 62.03,15.32 62.03,8.69 84.02,8.69
  pour Top: 59.94,14.22 44.2,14.22 44.2,-0.25 59.94,-0.25
  pour Top: 67.46,52.01 67.46,54.55 70,57.09 70,63.65 57,63.65 57,57.09 59.54,54.55 59.54,52.01 60.9,50.65 66.1,50.65
H3_INT1  (via drill 0.35)
  Top 0.254: U2.11 91.31,34.54 v90.81,34.04
  Route2 0.254: v90.81,34.04 96.27,34.04 99.06,36.83 101.6,36.83 102.36,36.07 JP7.2
H3_INT2  (via drill 0.35)
  Top 0.203: U2.9 88.9,33.56 v88.9,33.02
  Route2 0.203: v88.9,33.02 90.17,31.75 97.79,31.75 99.82,33.78 JP7.3
HINTN
  Top 0.305: JP6.4 66.55,8.89 67.31,8.89 69.85,11.43 72.57,11.43 U$4.5
ICM_INT
  Top 0.254: U6.4 98.54,24.65 99.06,24.13 100.33,24.13 103.38,27.18 103.38,32.64 JP7.1
MISO
  Top 0.406: JP1.4 36.83,17.02 52.7,17.02 55.63,14.1 55.63,13.13 J7.7 55.56,27.62 62.87,34.92 70.48,34.92 77.55,41.99 U1.2
MOSI
  Top 0.305: U1.3 78.16,44.45 77.47,44.45 77.47,44.2 69.09,35.81 47.24,35.81 34.29,22.86 JP1.5
  Top 0.406: J7.3 51.16,14.24 49.28,16.13 34.92,16.13 34.29,16.76 JP1.5
N$1
  Top 0.813: U1.13 60.72,45.99 SJ9.1 59.69,44.96 JP4.1
N$2
  Top 0.813: R17.1 121.5,20.32 H7.B2,8
N$5
  Top 0.305: U11.1 38.05,55.37 C6.2
N$6  (via drill 0.35)
  Top 1.016: v29.21,48.26 v28.07,48.26 SJ10.2
  Route2 1.016: J2.3 42.86,59.82 30.99,59.82 30.99,59.69 27.18,55.88 27.18,48.26 v29.21,48.26 SJ10.2
N$7
  Top 0.203: U6.1 97.04,24.65
  Top 0.254: SJ5.2 91.44,29.21
  Top 0.305: 91.44,29.21 92.71,27.94 92.71,25.4 93.98,24.13 96.52,24.13 97.04,24.65
N$8
  Top 0.813: R18.1 H8.B2,8
N$9
  Top 0.254: C2.2 39.62,51.05 39.88,51.31 39.5,51.31
  Top 0.305: 38.1,49.52 U11.16 38.05,49.91 | SJ8.2 38.05,49.91 | 38.05,49.91 38.05,50.88 38.48,51.31 39.88,51.31
N$10
  Top 0.254: R1.2 R3.2 91.22,20.32 89.41,20.32 88.14,19.05 88.14,18.16 88.49,17.81 U8.16
N$11
  Top 0.305: 37.41,53.45 U11.2 37.41,53.01 37.72,52.7 39.37,52.7 39.66,53 C7.2
N$12
  Top 0.305: C6.1 36.77,55.78 U11.3
N$13
  Top 0.305: U11.4 36.13,56.87 C8.2
N$14
  Top 0.305: C8.1 35.56,58.76 | 35.56,58.76 35.49,58.76 | U11.5 35.49,58.7 35.56,58.76
N$15
  Top 0.305: U11.6 34.85,56.5 C9.2
N$16  (via drill 0.35)
  Top 1.016: v24.13,48.26 SJ11.2 v21.59,48.26
  Route2 1.016: v21.59,48.26 v24.13,48.26 24.13,54.99 30.75,61.61 J4.3
N$17
  Top 0.254: U7.16 93.92,45.72 95.25,45.72 95.89,45.09 R4.2 R9.2
N$18
  Top 0.305: U3.1 24.77,56.64 25.15,57.02 R2.2 C3.2
N$19
  Top 0.305: R10.2 27.09,53.06 LED1.A
N$20
  Top 0.813: R13.1 121.92,38.1 H9.B2,8
N$21
  Top 0.813: R14.1 121.5,44.45 H10.B2,8
N$22
  Top 0.813: H11.B2,8 95.25,56.73 R20.1
N$23
  Top 0.813: R19.1 87.63,56.73 H12.B2,8
N$24
  Top 0.813: H13.B2,8 111.76,59.27 R22.1
N$25
  Top 0.813: R21.1 104.14,56.73 H14.B2,8
N$26
  Top 0.813: R23.1 87.63,5.08 H15.B2,8
N$27
  Top 0.813: R24.1 92.71,5.08 H16.B2,8
N$28
  Top 0.813: R15.1 104.14,6.77 H17.B2,8
N$29
  Top 0.813: R16.1 111.76,5.5 H18.B2,8
N$30
  Top 0.254: U13.1 51.12,45.82 R45.1
  Top 0.406: SJ6.2 48.01,47.56 C22.1 49.12,48.23 U13.1
N$31
  Top 0.305: J9.1 63.62,59.31
  Top 0.61: 63.62,59.31 U1.9
N$32
  Top 0.305: U4.2 113.23,37.45 114.3,38.52 C10.1
  Top 0.813: C10.1 115.99,38.1 R13.2
N$34
  Top 0.305: U4.4 112.83,38.75 114.3,40.22 C10.2 | 117.05,41.7 R14.2
  Top 0.813: C10.2 117.05,41.7
N$35
  Top 0.254: U2.7 88.27,36.2 | SJ7.2 85.98,29.21 85.09,30.1 85.09,33.02
  Top 0.305: 85.09,33.02 88.27,36.2
N$37
  Top 0.305: LED4.A R27.2
N$38
  Top 0.305: JP1.10 28.07,25.53 28.07,40.01 29.84,41.78 32.51,41.78 JP10.2
N$39
  Top 0.305: JP1.9 30.48,25.4 30.48,40.01 31.5,41.02 34.42,41.02 35.56,42.16 JP11.2
N$44
  Top 0.305: U$4.14 73.84,29.03 80.01,22.86 88.01,22.86 88.65,23.5 SJ3.2
N$45
  Top 0.305: C12.1 92.09,51.87 U7.2
  Top 0.813: R20.2 C12.1
N$46
  Top 0.305: C12.2 90.79,51.87 U7.4
  Top 0.813: C12.2 R19.2
N$47
  Top 0.305: U8.2 90.79,13.32 89.32,11.85 C15.1
  Top 0.813: C15.1 R23.2
N$48
  Top 0.305: U10.4 103.49,51 C1.2
  Top 0.813: R21.2 104.56,52.91 C1.2
N$49
  Top 0.305: U8.4 92.09,13.35 91.23,12.49 91.23,11.22
  Top 0.813: R24.2 91.23,11.22 C15.2
N$50
  Top 0.305: C1.1 104.79,50.6 U10.2
  Top 0.813: R22.2 C1.1
N$51
  Top 0.305: U9.2 113.26,24.75 113.46,24.55 C13.1 | 117.05,23.07 R17.2
  Top 0.813: C13.1 117.05,23.07
N$53
  Top 0.305: U9.4 115.37,26.05 C13.2 | 117.05,27.73 R18.2
  Top 0.813: C13.2 117.05,27.73
N$54
  Top 0.305: U5.2 103.49,12.5 C11.1
  Top 0.813: C11.1 R15.2
N$55
  Top 0.305: U5.4 104.79,13.32 106.26,11.85 C11.2 | 109.01,9.95 R16.2
  Top 0.813: C11.2 107.53,11.43 109.01,9.95
N$57
  Top 0.305: R25.2 97.79,18.63 98,18.84 | 98,18.84 R26.2 | U5.16 99.03,17.81 98,18.84
N$58
  Top 0.305: R32.2 105.62,21.8 | 105.62,21.8 108.37,19.05 R31.2 | U9.16 106.77,21.8 105.62,21.8
N$60
  Top 0.305: U4.16 107.92,31.76 107.91,31.75 R36.2 107.55,31.75 R35.2
N$62
  Top 0.305: U10.16 106.62,45.72 109.22,45.72 110.49,46.99 R40.2 110.62,47.54 R39.2
PS1
  Top 0.305: JP6.2 67.06,5.71 71.5,10.16 76.2,10.16 77.84,11.8 U$4.7
R232
  Top 0.305: U11.8 33.57,55.33 31.88,57.02 31.88,60.81 J4.2
R232_GPS
  Top 0.305: U11.13 36.13,46.16 37.47,44.83 38.12,44.83 JP9.1
RADIO_INT
  Top 0.305: U1.14 61.77,43.99 59.69,41.91 41.91,41.91 JP3.10
RADIO_RESET
  Top 0.305: JP3.8 34.29,38.1 35.56,36.83 44.45,36.83 45.82,38.2 65.5,38.2 77.3,49.99 U1.6
RADIO_SS
  Top 0.305: U1.5 77.2,47.99 66.55,37.34 46.1,37.34 44.32,35.56 34.29,35.56 31.75,38.1 JP3.7
RGPS
  Top 0.305: 34.75,43.73 JP11.3 34.75,45.72 35.49,46.47 U11.12
RIRI
  Top 0.254: 33.57,48.81 U11.9
  Top 0.305: JP3.4 33.57,48.81
RX1
  Route15 0.305: J1.1 34.75,10.88 39.37,15.5 JP1.3
RX4
  Top 0.305: J6.1 17.78,4.99 17.78,17.78 JP1.11
RX_GPS  (via drill 0.35)
  Top 0.305: JP11.1 36.6,43.41 JP9.2 39.6,43.41 40.64,44.45 40.64,45.72 41.91,46.99 v41.91,48.26
  Route2 0.305: v41.91,48.26 41.91,56.87 J2.2
SCK  (via drill 0.35)
  Top 0.305: U1.4 79.74,45.99 80.01,45.72 76.2,45.72 67.06,36.58 46.74,36.58 31.75,21.59 JP1.6
  Top 0.406: v52.96,14.61 53.37,14.2 J7.5
  Route2 0.305: v52.96,14.61 52.96,15.11 52.45,15.62 35.18,15.62 JP1.6
SCL  (via drill 0.35)
  Top 0.203: v93.98,29.21 93.98,27.94 95.25,26.67 U6.13
  Top 0.305: U$4.12 77.84,31.74 v77.47,31.37 | v90.17,41.02 90.81,40.38 U2.4 | v87.38,17.78 87.38,16.64 88.15,15.86 U8.19 | U5.19 100.98,15.86 v100.33,16.51 | v109.22,21.59 109.87,22.24 U9.19 | U4.19 109.87,34.94 v109.22,34.29 | U7.19 94.6,47.64 v95.25,46.99 | v107.95,46.99 107.3,47.64 U10.19 | J3.1 48.77,29.63 48.77,24.68 R8.2
  Route15 0.305: JP3.11 47.8,33.48 J3.1 57.27,28.83 74.93,28.83 v77.47,31.37 80.39,34.29 83.62,34.29 90.17,40.84 v90.17,41.02 | v90.17,41.02 93.98,37.21 v93.98,29.21 | v93.98,29.21 95.25,27.94 95.25,26.67 | v87.38,17.78 87.38,18.8 95.25,26.67 | v100.33,16.51 96.27,20.57 96.27,25.65 | 95.25,26.67 96.27,25.65 | 96.27,25.65 100.33,21.59 v109.22,21.59 | v93.98,29.21 94.23,29.46 106.93,29.46 109.22,31.75 v109.22,34.29 | v90.17,41.02 95.25,46.1 v95.25,46.99 | v90.17,41.02 103.25,41.02 107.95,45.72 v107.95,46.99
SD_CS
  Top 0.406: J7.2 50.06,14.2 49.02,15.24 30.48,15.24 29.21,16.51 JP1.7
SDA  (via drill 0.35)
  Top 0.203: U6.14 94.49,26.16 v93.98,26.67
  Top 0.305: v79.88,31.37 79.84,31.41 U$4.11 | v89.15,38.63 89.15,36.7 U2.6 | v86.36,16.51 87.66,15.21 U8.20 | v100.33,15.24 100.36,15.27 100.42,15.21 U5.20 | U9.20 110.52,21.62 v109.22,20.32 | v110.49,34.29 110.49,35.62 U4.20 | U7.20 95.22,48.29 v95.25,48.26 | U10.20 107.92,48.29 v107.95,48.26 | R7.2 49.53,25.82 49.53,28.39 J3.2
  Route2 0.305: J3.2 44.73,39.37 JP3.12 | v93.98,26.67 96.77,23.88 96.77,18.8 v100.33,15.24 | v93.98,26.67 100.33,20.32 v109.22,20.32 | v93.98,26.67 96.14,28.83 107.57,28.83 110.49,31.75 v110.49,34.29 | v95.25,48.26 96.52,46.99 96.52,44.45 90.7,38.63 v89.15,38.63 90.68,38.63 90.81,38.76 102.26,38.76 109.22,45.72 109.22,46.99 v107.95,48.26
  Route15 0.305: J3.2 56.16,27.94 76.45,27.94 v79.88,31.37 81.92,31.37 88.77,38.23 88.77,38.25 v89.15,38.63 89.15,38.61 92.71,35.05 92.71,27.94 v93.98,26.67 86.36,19.05 v86.36,16.51
T232
  Top 0.305: U11.7 34.21,55.58 32.51,57.28 32.51,59.44 J4.1
T232_GPS
  Top 0.305: JP8.1 37.57,46.89 36.77,47.68 U11.14
TGPS
  Top 0.254: 34.85,48.9 U11.11
  Top 0.305: 34.85,48.9 34.85,47.25 33.33,45.72 JP10.3
TIRI
  Top 0.305: JP3.5 26.67,40.64 34.21,48.18 U11.10
TX1
  Route15 0.305: J1.2 32.75,11.16 38.1,16.51 38.1,19.81 38.99,20.7 40.64,20.7 41.91,19.43 JP1.2
TX4
  Route15 0.305: JP1.8 25.02,17.4 17.65,17.4 16.51,16.26 16.51,4.89 17.51,3.9 J6.2
TX_GPS  (via drill 0.35)
  Top 0.305: JP10.1 v30.48,43.18 | v43.05,49.15 41.53,49.15 40.64,48.26 40.64,46.99 39.73,46.08 JP8.2
  Route15 0.305: v30.48,43.18 43.31,43.18 43.94,43.81 43.94,48.26 v43.05,49.15 43.05,56.01 J2.1
VBAT  (via drill 0.35)
  Top 0.813: v46.99,43.18 48.26,43.18 49.53,44.45 SJ6.3
  Top 1.27: JP3.1 13.59,39.37 10.79,42.16 10.79,46.86 9.53,48.13 8.31,48.13 J5.3 8.04,48.15 7.93,48.26 6.35,48.26 5.62,47.53 JP12.4
  Route2 0.813: JP3.1 16.51,40.85 16.98,41.32 45.13,41.32 v46.99,43.18
VBUS
  Top 0.813: SJ4.2 19.05,41.91 JP3.3
VIN
  Top 1.016: J8.3 18.8,50.53 22.11,50.53 SJ11.1 SJ10.1
  Top 1.27: U3.4 16.38,61.72 18.8,59.31 18.8,50.53
  Route2 1.27: JP12.3 3.81,49.53 4.7,50.42 4.7,53.72 6.22,55.24 9.4,55.24 10.92,53.72 10.92,51.82 12.19,50.55 13.4,50.55 J8.3
VIN_PRE
  Top 1.27: U3.6 12.19,56.77 10.79,55.37 10.79,51.44 9.64,50.28 J5.2 5.6,50.28 4.35,51.53 JP12.2

## Text on the board
tNames: - | + | - | + | TC6 | 915Mhz ANT | TC5 | H3 INT 1 / H3 INT 2 / ICM INT | VIN | 5v | VBUS to 5V | Radio power | X | - | TC4 | + | Y | I2C | Z | ADDR / SELECT | 3V3 / / GND | SCL / SDA / 3V3 / GND | 3V | - | GND | TC3 | + | ADDR / SELECT / FSM300 | GND | ACT | GND / 5V / TX (A4) / RX (A1) | BOOTN | GND / 5V / TX (D1) / RX (D0) | RST | TC1 | TC2 | INT | PS1 | + | - | + | -
bNames: GND / VIN / GND / 5V | Matt Ruffner, Evan Wells, Kirsten Ford, Bruno Tacchi, Logan Craig, / Dr. Alexandre Martin / Dr. Bill Smith / Dr. Savio Poovathingal | VIN - / VIN + / VBAT + / VBAT - | 13 | 21 | GND / VIN / VBAT / 5V | 14 | 4 | 14 EXT_INT / 15 RX4 / 16 TGPS / 17 RGPS / 18 TX4 / 19 SD_CS / 25 SCK / 24 MOSI / 23 MISO / 0 RX1 / 1 TX1 / 4 unused | NEOPIXEL 8 / VBAT/2 A6 / RIRI 13 / TIRI 12 / GATE_IR 11 / RADIO_SS 10 / RADIO_RST 9 / 3V32_CTRL 6 / RADIO_INT 5 / SCL 22 / SDA 21 | KREPE Flight Computer v2.1 (1/13/2023)